# Altium PCB PCB1.PcbDoc
Units mm, origin at the board's own origin, x right, y up, seen from the top; angles counter-clockwise.
Board outline 45 x 45 mm, 2 copper layers (Top Layer, Bottom Layer); 38 components, 26 nets, 179 pads, 50 vias.
Unrouted connection lines stored in the file: 71.
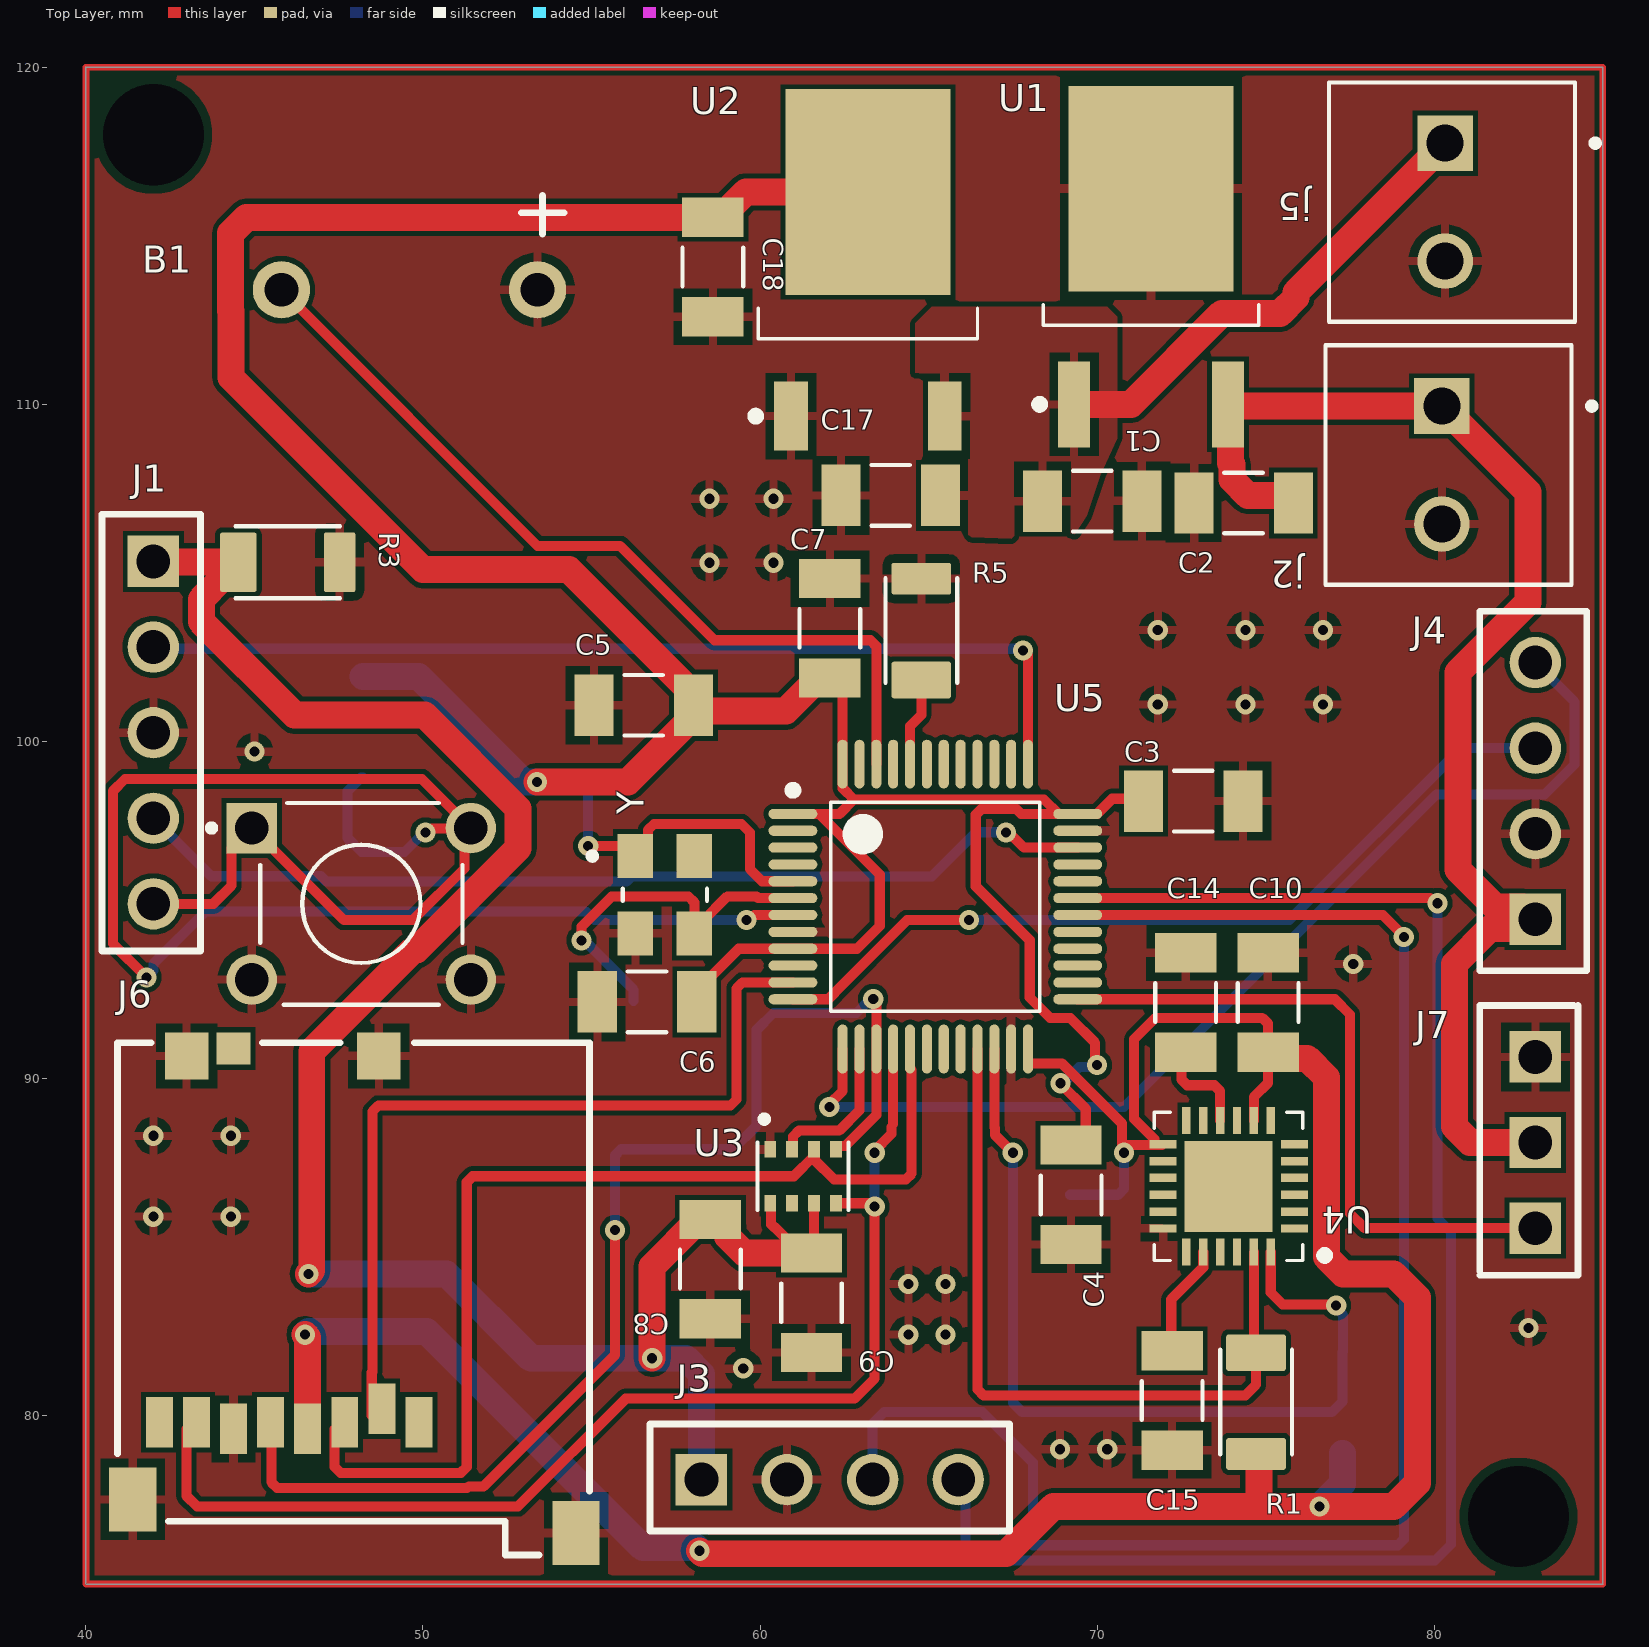
[diagram p0: Top Layer view]
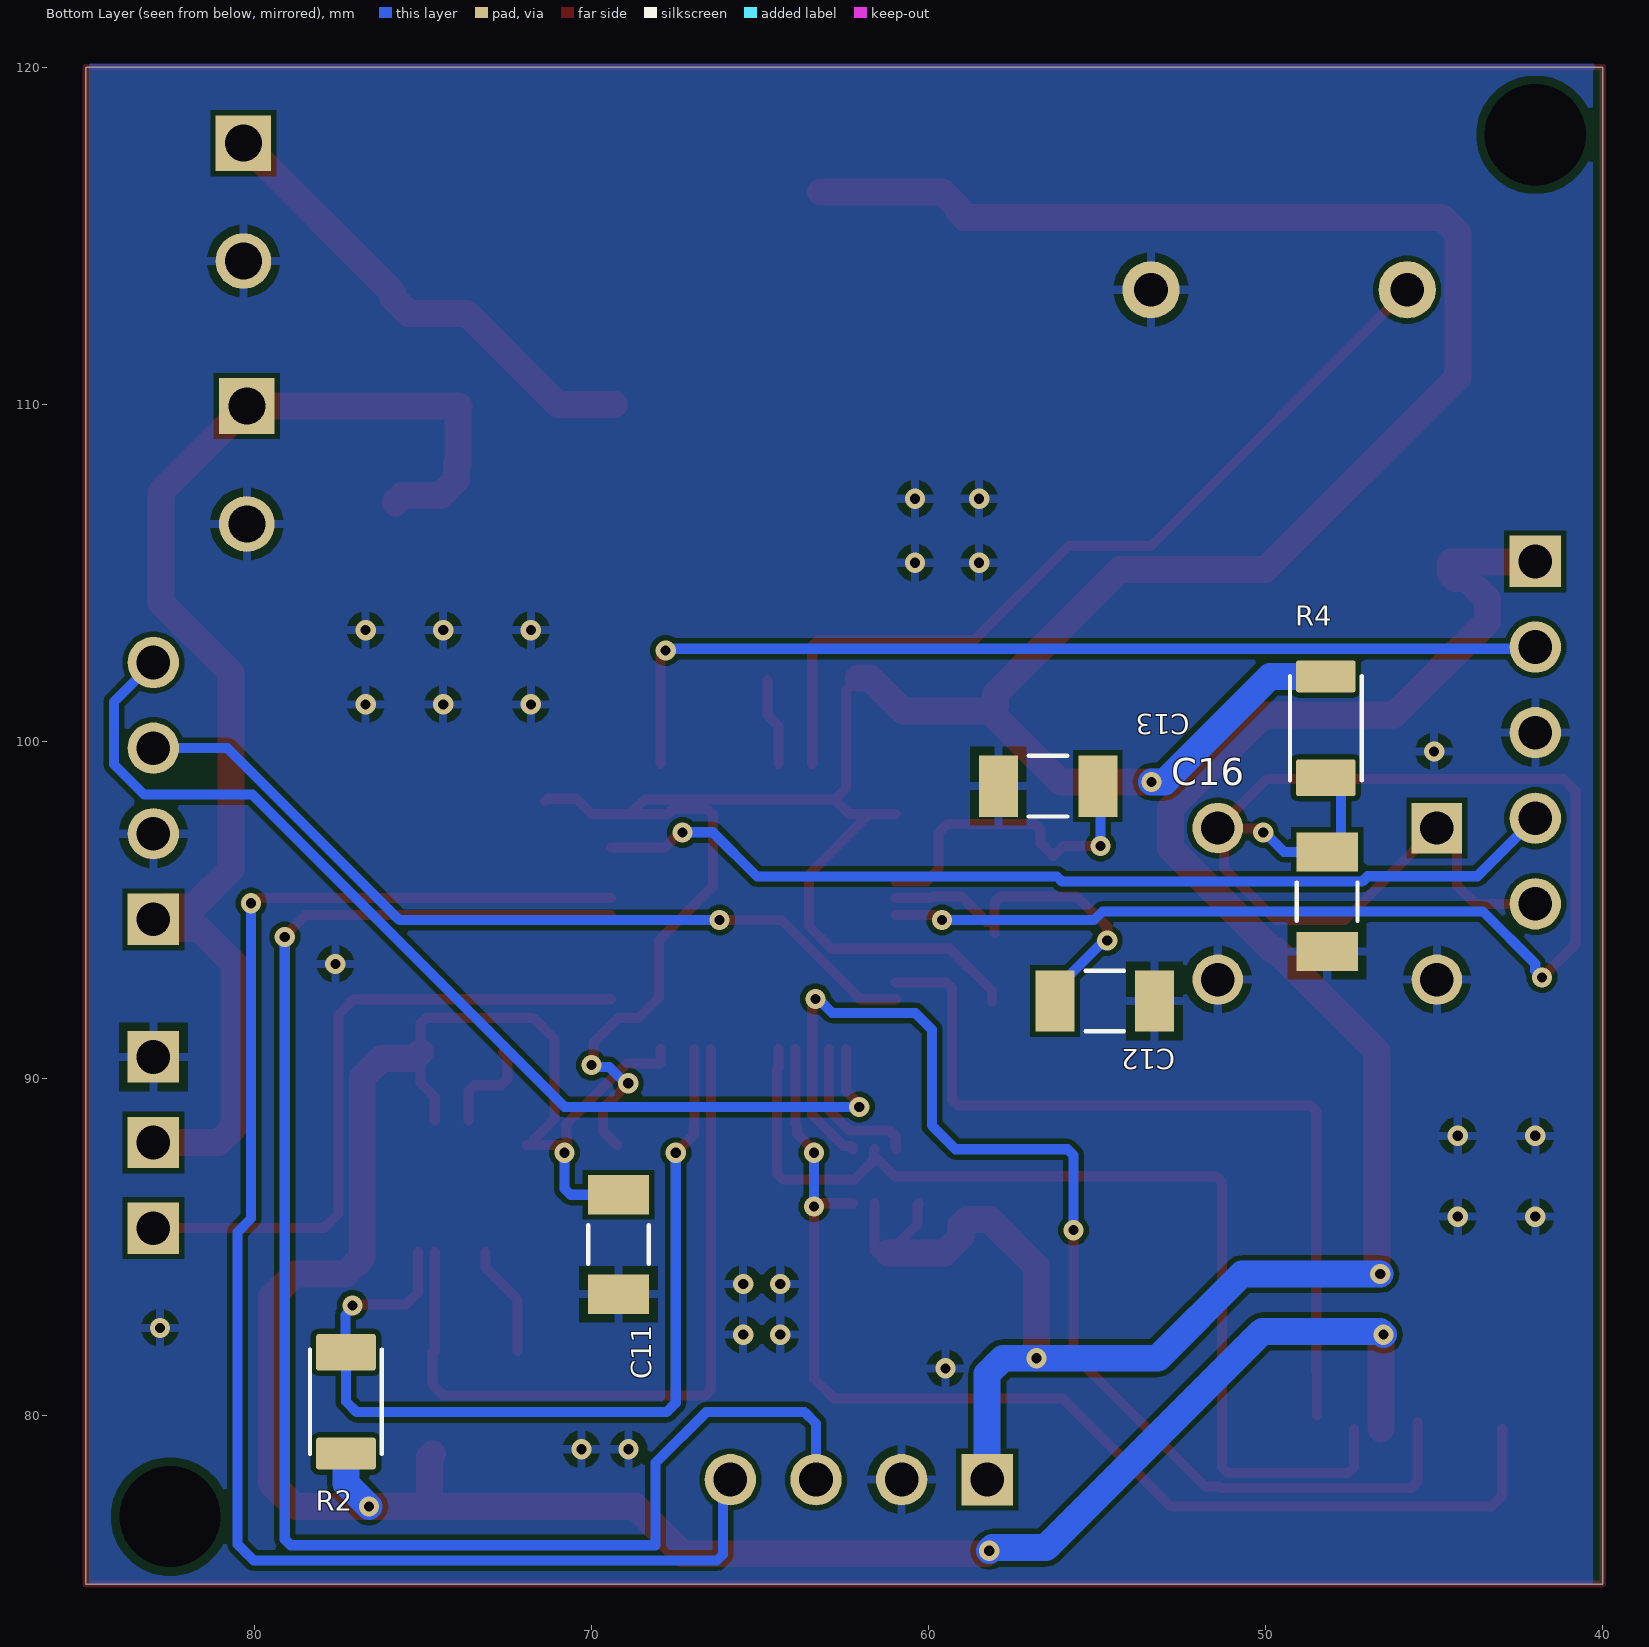
[diagram p1: Bottom Layer view, seen from below]
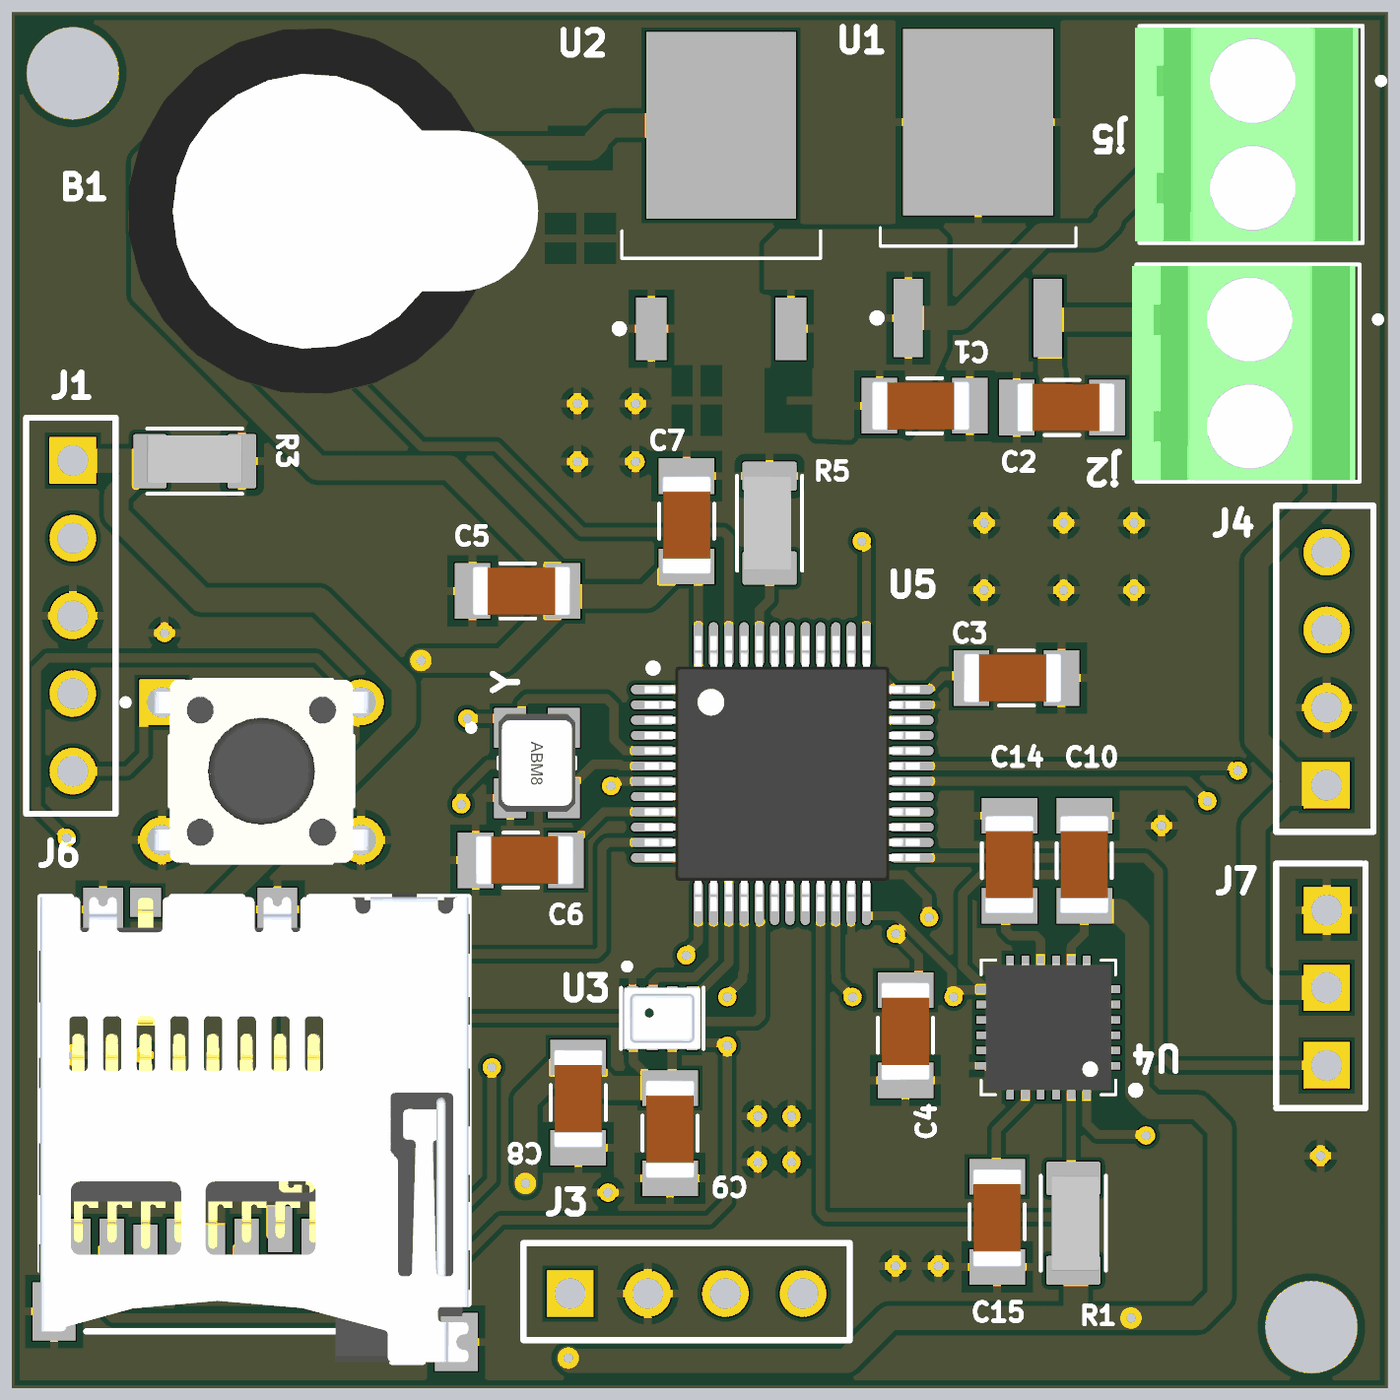
[diagram p2: 3D render of the assembled board from above, using the file's embedded part models]
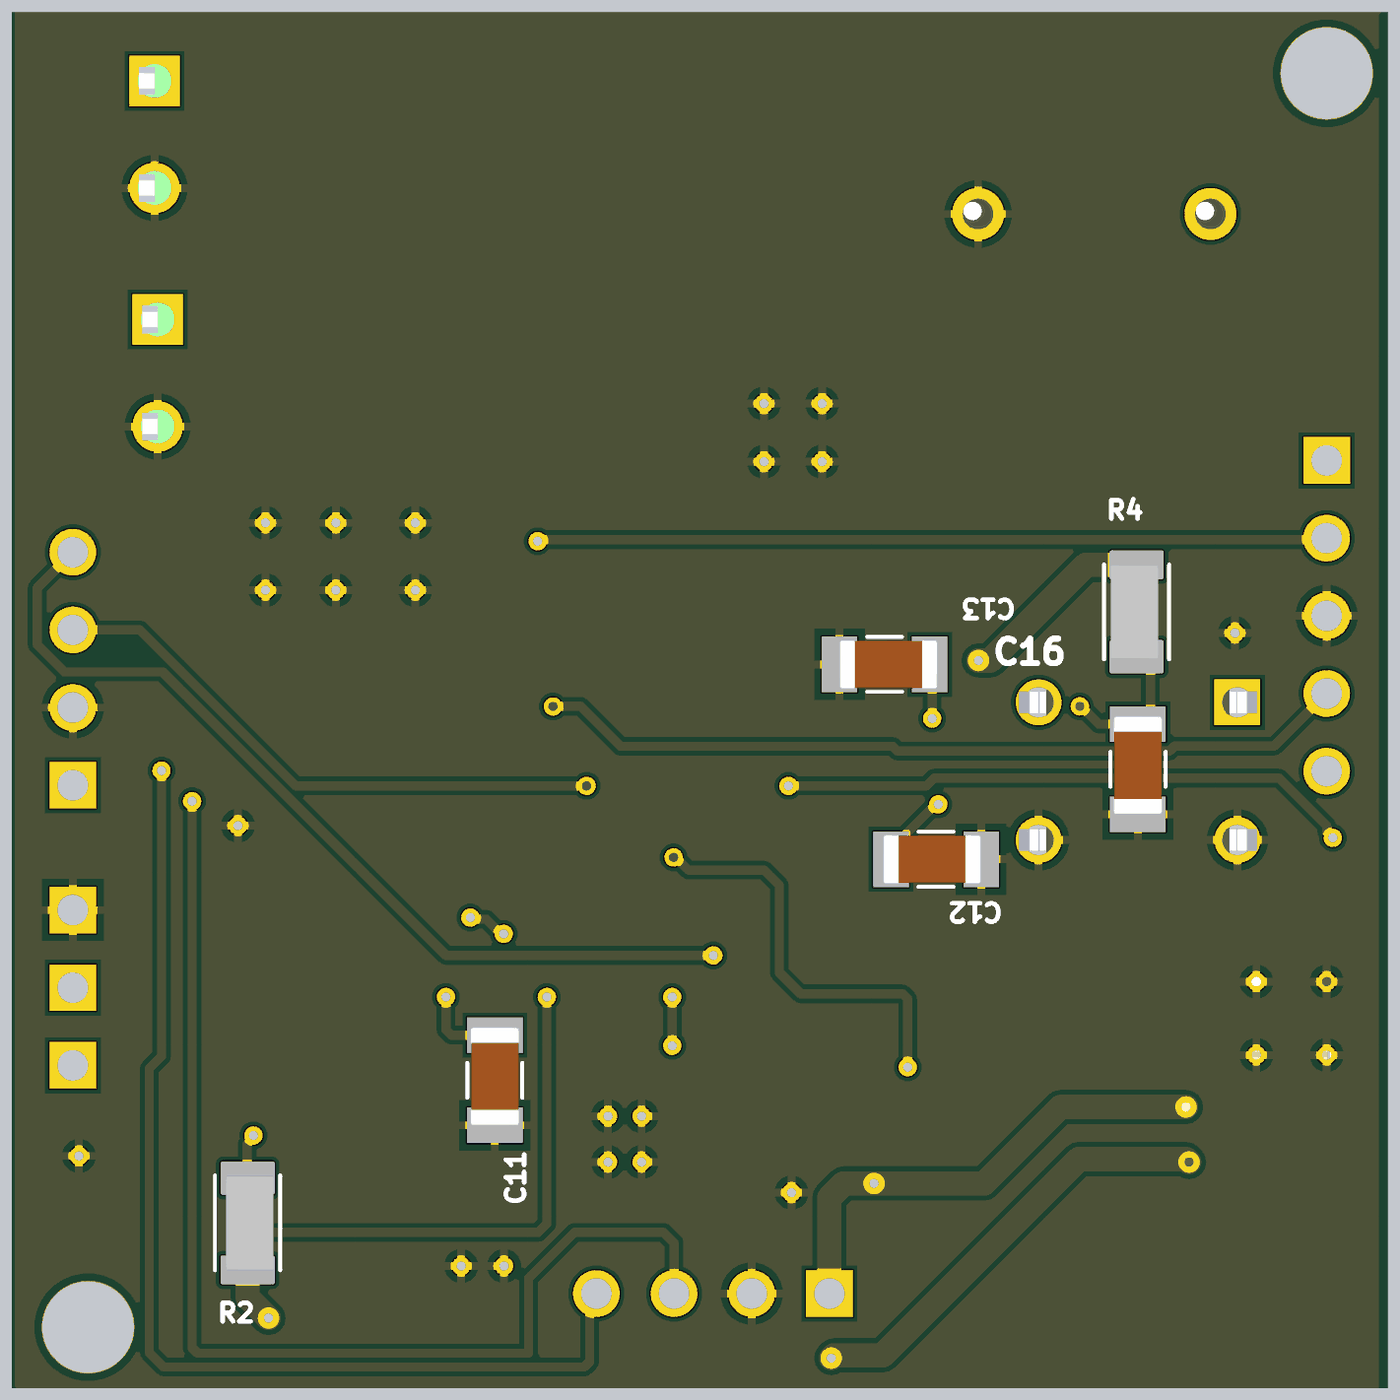
[diagram p3: 3D render of the assembled board from below, using the file's embedded part models]

## Layer stack, top to bottom
Top Solder: solder mask 0.0102, Solder Resist, Dk 3.5
Top Layer: signal copper 0.0356
Dielectric 1: dielectric 0.32, FR-4, Dk 4.8
Bottom Layer: signal copper 0.0356
Bottom Solder: solder mask 0.0102, Solder Resist, Dk 3.5

## Board outline
40,75 85,75 85,120 40,120

## Design rules (kind name [scope] priority, off if disabled: settings)
Clearance [All] p1: gap=0.254 ignorepadtopadclearanceinfootprint=FALSE except(0.152: Arc-Track Arc-SMDPad Arc-Poly Track-Track Track-SMDPad Track-Poly SMDPad-SMDPad SMDPad-THPad SMDPad-Poly THPad-Poly Via-Poly Fill-Poly Poly-Poly)
HoleSize [All] p1: absolutevalues=TRUE maxlimit=3 minlimit=0.01 maxpercent=80.000 minpercent=20.000
HoleToHoleClearance [All] p1: gap=0 allowstackedmicrovias=TRUE
MinimumSolderMaskSliver [All] p1: minsoldermaskwidth=0.1
PolygonConnect [All] p1: connectstyle=Relief reliefconductorwidth=0.254 reliefentries=4 polygonreliefangle="90 Angle" airgapwidth=0.254
RoutingVias [All] p1: holewidth=0.3 width=0.6 viastyle="Through Hole" minholewidth=0.2 minwidth=0.2 maxholewidth=0.9 maxwidth=1.27
SilkToSolderMaskClearance [HasFootprint('No Footprint')] p1: minsilkscreentomaskgap=0.254 clearancetoexposedcopper=TRUE
SolderMaskExpansion [All] p1: expansion=0.05 istentingtop=FALSE
Width [All] p1: maxlimit=1 minlimit=0.1 preferedwidth=0.3 minimp=50.000000 maximp=50.000000 favimp=50.000000
26 further rules are at their usual default settings.

## Classes and differential pairs
component class Schematic1: C1 C2 C3 C4 C5 C6 C7 C8 C9 C10 C11 C12 C13 C14 C15 C16 C17 C18 j2 J3 J4 j5 J6 J7 R1 R2 R3 R4 R5

## Components (designator, comment, footprint, x,y, rotation, side; value= is the part's Value field where it differs from the comment)
B1 "BUZZER" Buzzer 45.8,110.86 r0 top
C1 "330nF" 1206CAPACITOR 69.6,107 r180 top
C2 "0.1uF" 1206CAPACITOR 74.6,107.2 r0 top
C3 "0.1uF" 1206CAPACITOR 72.6,98.1 r180 top
C4 "0.1uF" 1206CAPACITOR 69.1,86.8 r90 top
C5 "0.1uF" 1206CAPACITOR 56.8,101.2 r0 top
C6 "0.1uF" 1206CAPACITOR 56.9,92.4 r0 top
C7 "0.1uF" 1206CAPACITOR 62.2,103.1 r270 top
C8 "0.1uF" 1206CAPACITOR 58.4,84.6 r90 top
C9 "0.1uF" 1206CAPACITOR 61.4,83.6 r90 top
C10 "0.1uF" 1206CAPACITOR 75.2,92 r270 top
C11 "0.1uF" 1206CAPACITOR 69.327,85.329 r90 bottom
C12 "16pF" 1206CAPACITOR 55.029,92.173 r0 bottom
C13 "16pF" 1206CAPACITOR 56.2,98.8 r180 bottom
C14 "0.1uF" 1206CAPACITOR 72.754,92 r270 top
C15 "2.2nF" 1206CAPACITOR 72.1,80.7 r90 top
C16 "0.1uF" 1206CAPACITOR 48.3,95.5 r90 bottom
C17 "10uF" pol_smal_capacitor -390.658,107.046 r180 top
C18 "10uF" pol_smal_capacitor 58.854,-340.458 r270 top
J1 "HEADER 1X5" "HEADER 1X5_2.54mm" 40.349,105.086 r270 top
j2 "klemens 2x1_3.5mm" "KLEMENS 2X1_3.5mm - duplicate" 80.1,108.2 r270 top
J3 "HEADER 1X4" "HEADER 1X4_2.54mm" 58.387,77.592 r0 top
J4 "HEADER 1X4" "HEADER 1X4_2.54mm" 83.508,94.847 r90 top
j5 "klemens 2x1_3.5mm" "KLEMENS 2X1_3.5mm - duplicate" 80.2,116 r270 top
J6 "SD CARD_1" "SD CARD" 48,85.5 r0 top
J7 "HEADER 1X3" "HEADER 1X3_2.54" 88.715,89.243 r90 top
R1 "4.7K" RES 73.9,79.889 r270 top
R2 "4.7K" RES 78.1,79.9 r270 bottom
R3 "10K" RES 46.5,104.5 r0 top
R4 "RES" RES 47.4,100.9 r90 bottom
R5 "10K" RES 65.6,103.8 r90 top
U1 "L7805-SMD" DPAK228P968X230-3N 71.6,114.1 r90 top
U2 "LD108633_DPAK" "LD1086 3.3 REGULATOR" 63.2,114 r90 top
U3 "BMP280" BMP280 62.037,89.513 r90 top
U4 "MPU6050" MPU6050 74.027,88.578 r180 top
U5 "STM32F101" PQFP48-STM 65.2,95.1 r0 top
Y "OSC-8MHz" "OSC KRISTAL" 59.842,95.196 r0 top
? "push_button" push_button 46.9,94.8 r0 top

## Footprints (in the part's own frame and the unit in brackets; to place one, negate y for a bottom-side part, rotate by r counter-clockwise, add the part's x,y. Pads: shape width x height; smd on the part's side, far side on the other; paste and mask are expansions set on the pad)
1206CAPACITOR [mm]
  rect 1.16x1.82 smd: 1(-1.729,-0.127) 2(1.221,-0.127)
  silkscreen extent -0.82,-1.03 0.32,0.77, body extent -1.73,-0.93 1.47,0.67, height 1
BMP280 [mm] "gyro ve ivmeölçer"
  rect 0.5x0.35 smd: 1(-1.613,1.737) 2(-1.613,1.087) 3(-1.613,0.437) 4(-1.613,-0.213) 5(-3.213,-0.213) 6(-3.213,0.437) 7(-3.213,1.087) 8(-3.213,1.737)
  silkscreen extent -3.41,-0.59 -0.62,2.11, body extent -3.41,-0.49 -1.41,2.01, height 1
Buzzer [mm]
  round 1.7 hole 1: 1(0,2.54) 2(7.6,2.54)
  silkscreen extent 7.11,4.19 8.38,5.33, body extent -2.02,-3.36 11.42,8.64, height 10.05
DPAK228P968X230-3N [mm] "D-PAK, 3-Pads, Body 6,40x6,56mm (max), IPC Medium Density"
  rect 2.55x0.95 smd: 1(-4.1,2.28) 2(-4.1,-2.28)
  rect 6.1x4.9 smd: 3(2.3,0)
  silkscreen extent -4.22,-3.2 -1.15,3.43, body extent -1.75,-3.2 4.85,3.2, height 2.3
"HEADER 1X3_2.54" [mil]
  rect 60x60 hole 39.37: 1(-145,225) 2(-45,225) 3(55,225)
  silkscreen extent -200,175 115,290, body extent -195,180 105,280, height 276
"HEADER 1X4_2.54mm" [mil]
  rect 60x60 hole 39.37: 1(-5,20)
  round 60 hole 39.37: 2(95,20) 3(195,20) 4(295,20)
  silkscreen extent -65,-40 355,85, body extent -55,-30 345,70, height 276
"HEADER 1X5_2.54mm" [mil]
  round 60 hole 39.37: 2(90,65) 3(190,65) 4(290,65) 5(390,65)
  rect 60x60 hole 39.37: ""(-10,65) ""(-10,65)
  silkscreen extent -65,5 445,120, body extent -60,10 440,110, height 276
"KLEMENS 2X1_3.5mm - duplicate" [mm]
  rect 1.65x1.65 / inner round 1.65 / far side rect 1.65x1.65 hole 1.1: 1(-1.75,0.127)
  round 1.65 hole 1.1: 2(1.75,0.127)
  silkscreen extent -3.55,-3.32 3.55,4.68, body extent -3.5,-3.47 3.5,3.83, height 8.5
"LD1086 3.3 REGULATOR" [mm] "D-PAK, 3-Pads, Body 6,15x6,61mm (max), IPC Medium Density"
  rect 2.05x1 smd: 1(-4.35,2.28) 2(-4.35,-2.28)
  rect 6.1x4.9 smd: 3(2.3,0)
  silkscreen extent -4.47,-3.25 -1.15,3.45, body extent -2.05,-3.25 4.05,3.25, height 2.3
MPU6050 [mm] "ivme gyro ölçer"
  rect 0.8x0.25 smd mask+0.05: 1(-1.823,3.028) 2(-1.823,2.528) 3(-1.823,2.028) 4(-1.823,1.528) 5(-1.823,1.028) 6(-1.823,0.528) 13(2.077,0.528) 14(2.077,1.028) 15(2.077,1.528) 16(2.077,2.028) 17(2.077,2.528) 18(2.077,3.028)
  rect 0.25x0.8 smd mask+0.05: 7(-1.123,-0.172) 8(-0.623,-0.172) 9(-0.123,-0.172) 10(0.377,-0.172) 11(0.877,-0.172) 12(1.377,-0.172) 19(1.377,3.728) 20(0.877,3.728) 21(0.377,3.728) 22(-0.123,3.728) 23(-0.623,3.728) 24(-1.123,3.728)
  rect 2.6x2.7 smd: 25(0.127,1.778)
  silkscreen extent -2.85,-0.42 2.33,3.98, body extent -1.94,-0.29 2.2,3.85, height 0.9
"OSC KRISTAL" [mm]
  rect 1.05x1.3 smd: 1(-3.542,1.404) 2(-3.542,-0.896) 3(-1.792,-0.896) 4(-1.792,1.404)
  silkscreen extent -4.92,0.07 -1.42,1.5, body extent -3.92,-1.35 -1.42,1.85, height 0.8
pol_smal_capacitor [mm]
  rect 1.16x1.82 smd: 1(-456.008,-0.254) 2(-453.058,-0.254)
  silkscreen extent -455.1,-1.15 -453.96,0.65, body extent -456.01,-1.05 -452.81,0.55, height 1
PQFP48-STM [mm] "TSQFP, 48-Leads, Body 7,00x7,00mm, Pitch 0,50mm, IPC Medium Density"
  oval 1.45x0.3 smd mask+0.05: 1(-4.225,2.75) 2(-4.225,2.25) 3(-4.225,1.75) 4(-4.225,1.25) 5(-4.225,0.75) 6(-4.225,0.25) 7(-4.225,-0.25) 8(-4.225,-0.75) 9(-4.225,-1.25) 10(-4.225,-1.75) 11(-4.225,-2.25) 12(-4.225,-2.75) 25(4.225,-2.75) 26(4.225,-2.25) 27(4.225,-1.75) 28(4.225,-1.25) 29(4.225,-0.75) 30(4.225,-0.25) 31(4.225,0.25) 32(4.225,0.75) 33(4.225,1.25) 34(4.225,1.75) 35(4.225,2.25) 36(4.225,2.75)
  oval 0.3x1.45 smd mask+0.05: 13(-2.75,-4.225) 14(-2.25,-4.225) 15(-1.75,-4.225) 16(-1.25,-4.225) 17(-0.75,-4.225) 18(-0.25,-4.225) 19(0.25,-4.225) 20(0.75,-4.225) 21(1.25,-4.225) 22(1.75,-4.225) 23(2.25,-4.225) 24(2.75,-4.225) 37(2.75,4.225) 38(2.25,4.225) 39(1.75,4.225) 40(1.25,4.225) 41(0.75,4.225) 42(0.25,4.225) 43(-0.25,4.225) 44(-0.75,4.225) 45(-1.25,4.225) 46(-1.75,4.225) 47(-2.25,4.225) 48(-2.75,4.225)
  silkscreen extent -4.35,-3.1 3.1,3.57, body extent -4.5,-4.5 4.5,4.5, height 1.6
push_button [mm]
  rect 1.498x1.498 / inner round 1.498 / far side rect 1.498x1.498 hole 0.99: 1(-1.98,2.631)
  round 1.498 hole 0.99: 2(4.52,2.631) 3(-1.98,-1.869) 4(4.52,-1.869)
  silkscreen extent -3.27,-2.61 4.27,3.38, body extent -2.63,-2.61 5.17,3.38, height 5.01
RES [mm]
  rrect14% 1.09x1.77 smd: 1(-1.977,0.816)
  rrect14% 0.94x1.77 smd: 2(1.028,0.816)
  silkscreen extent -2.06,-0.25 1.04,1.88, body extent -2.06,0.11 1.04,1.66, height 0.53
"SD CARD" [mm]
  rect 0.8x1.5 smd: 1(1.879,-5.697) 2(0.779,-5.297) 3(-0.321,-5.697) 4(-1.421,-5.897) 5(-2.521,-5.697) 6(-3.621,-5.897) 7(-4.721,-5.697) 8(-5.821,-5.697)
  rect 1x0.95 smd: 9(-3.621,5.388)
  rect 1.3x1.4 smd: 10(-5.011,5.163) 11(0.689,5.163)
  rect 1.4x1.9 smd: 12(6.539,-8.987) 13(-6.611,-7.987)
  silkscreen extent -7.06,-9.64 6.94,5.56, body extent -7.11,-9.64 6.99,5.66, height 1.95

## Part data
C1 C2 C3 C4 C5 C6 C7 C8 C9 C10 C11 C12 C13 C14 C15 C16: library part 1206CAPACITOR
C17 C18: library part "pol small capacitor"
R1 R2 R3 R5: library part RES
U1: "L7805-SMD REGULATOR"
U2: library part "LD1086-3.3 Regulator"
U5: DATASHEET=https://datasheetspdf.com/pdf-file/598718/STMicroelectronics/STM32F101xB/1

## Free pads (board coordinates)
  round 1.524 hole 3: 23(82.5,77) 24(42,118)

## Via types
v1: diameter 0.6, hole 0.3, Top Layer to Bottom Layer, 50 vias

## Nets (pads, with @x,y where several pads share a name; then routed paths per layer and width w, separated by ;. In a path a pad name is that pad's centre, name@x,y a point inside that pad or via, vN(x,y) a via of type N, cw(c..) or ccw(c..) an arc to the next point about the centre after c; other vN are vias at no path point)
3.3V: C3.2 C4.2 C5.2 C6.2 C7.2 C10.2 C11.2 C18.1 J6.4 R1.2 R2.2 R4.2 U2.3 U4.8 U4.13 U5.1 U5.9 U5.24 U5.36 U5.48 | length 177.5
  Top Layer w0.3: C6.2 58.121,92.603 59.368,93.85 62.876,93.85 63.55,94.524 63.55,96.05 61.75,97.85 ; U5.1 61.75,97.85 ; C7.2 62.45,101.502 U5.48 62.45,98.611 62.787,98.274 ; U5.24 67.95,90.45 68.95,90.45 70.743,88.657 70.743,88.057 v1@70.8,88 ; v1(68.91,89.86) 68.91,89.852 69.662,89.1 69.662,88.451 69.232,88.021 C4.2 ; v1(70,90.396) 69.943,90.453 69.943,91.057 69.207,91.793 68.607,91.793 68,92.4 68,94.1 66.4,95.7 66.4,97.824 66.576,98 67.592,98 67.742,97.85 U5.36@68.85,97.85 ; v1(70.8,87.796) v1@70.8,88 ; C3.2 71.306,98.3 70.45,98.3 70,97.85 U5.36 U5.36@68.85,97.85 ; U4.13@71.925,88.025 U4.13@71.75,88.025 ; U4.8 74.65,89.45 75.073,89.873 C10.2 75.073,91.624 74.897,91.8 71.731,91.8 71.1,91.169 71.1,88.8 71.7,88.2 71.7,88.075 U4.13@71.75,88.025 ; 61.75,97.85 62.362,97.85 62.787,98.274 ; 62.787,98.274 68.426,98.274 U5.36@68.85,97.85 ; v1@70.8,88 70.825,88.025 U4.13@71.75,88.025
  Top Layer w0.8: v1(46.5,82.4) 46.579,82.321 J6.4 ; v1(53.384,98.8) 56.078,98.8 C5.2@58.021,100.743 ; C5.2 58.021,101.403 54.326,105.098 50.002,105.098 44.3,110.8 44.3,112.773 44.296,112.777 44.296,115.077 44.769,115.55 C18.1 58.93,115.55 59.11,115.73 59.11,115.831 59.579,116.3 U2.3 ; C5.2@58.194,100.9 60.764,100.9 61.743,101.879 C7.2 ; v1(58.2,75.989) 58.289,75.9 67.3,75.9 68.7,77.3 75,77.3 ; R1.2 74.8,78.777 74.8,77.5 75,77.3 ; C10.2 75.253,90.599 76.231,90.599 76.802,90.028 76.802,84.698 77.3,84.2 78.8,84.2 79.5,83.5 79.5,78 78.8,77.3 v1(76.6,77.3) 75,77.3
  Bottom Layer w0.3: v1(68.91,89.86) 68.991,89.86 69.47,90.339 69.943,90.339 v1(70,90.396) ; C11.2 70.624,86.55 70.8,86.726 v1(70.8,87.796)
  Bottom Layer w0.8: v1(46.5,82.4) 46.6,82.5 50.1,82.5 56.521,76.079 58.11,76.079 v1(58.2,75.989) ; R4.2 49.872,101.928 53,98.8 v1(53.384,98.8) ; v1(76.6,77.3) 77.284,77.984 R2.2
3V3: C8.2 C9.2 J1. J3.1 R3.1 U3.6 U3.8 | length 61.1
  Top Layer w0.3: U3.8 60.325,86.275 60.325,85.675 60.4,85.6 60.418,85.6 61.197,84.821 C9.2 61.6,84.894 U3.6
  Top Layer w0.8: J1.@42,105.34 42.012,105.328 44.511,105.328 R3.1 44.523,104.976 44.378,104.831 44.038,104.831 43.423,104.216 43.423,103.553 46.194,100.783 50.052,100.783 52.823,98.012 52.823,96.83 49.81,93.818 49.713,93.818 46.7,90.805 46.7,84.3 v1(46.6,84.2) ; v1(56.8,81.7) 56.8,84.424 58.197,85.821 C8.2 58.857,85.821 59.037,85.641 59.037,85.311 59.527,84.821 C9.2@61.197,84.821
  Bottom Layer w0.8: v1(46.6,84.2) 50.7,84.2 53.2,81.7 v1(56.8,81.7) 57.795,81.7 58.264,81.231 J3.1@58.264,78.104
5V: C2.2 j2.1 J4.1 J7.2 U1.2 | length 39.6
  Top Layer w0.8: C2.2 75.821,107.12 75.641,107.3 74.472,107.3 74.003,107.769 74.003,108.212 73.955,108.26 73.955,109.925 73.93,109.95 j2.1 82.777,107.4 82.777,104.12 80.7,102.043 80.7,96.2 81.818,95.082 82.638,95.082 J4.1 82.729,94.449 81.649,94.449 80.6,93.4 80.6,88.569 81.069,88.1 J7.2
7.4V: C1.2 C17.1 j5.1 U1.1 U2.2 | length 14.3
  Top Layer w0.8: U1.1 71,110 73.7,112.7 75.431,112.7 75.9,113.169 75.9,113.323 j5.1
GND: ?.3 ?.4 B1.2 C1.1 C2.1 C3.1 C4.1 C5.1 C6.1 C7.1 C8.1 C9.1 C10.1 C11.1 C12.1 C13.1 C14.1 C15.1 C16.1 C17.2 C18.2 J1.3 j2.2 J3.2 J4.2 j5.2 J6.6 J6.10 J6.11 J6.12 J6.13 J7.3 R3.2 R5.2 U1.3 U2.1 U3.1 U3.7 U4.1 U4.9 U4.11 U4.18 U5.8 U5.23 U5.35 U5.47 Y.2 Y.4
  other v1: 68.9,79 70.3,79 59.5,81.4 64.4,82.4 65.5,82.4 82.8,82.6 64.4,83.9 65.5,83.9 42,85.9 44.3,85.9 42,88.3 44.3,88.3 77.6,93.4 45,99.7 71.8,101.1 74.4,101.1 76.7,101.1 71.8,103.3 74.4,103.3 76.7,103.3 58.5,105.3 60.4,105.3 58.5,107.2 60.4,107.2
Net_1: ?.1 ?.2 C16.2 J1.5 R4.1 U5.7 | length 57.5
  Top Layer w0.3: v1(41.8,93) 40.8,94 40.8,98.524 41.162,98.886 49.965,98.886 ?.2 51.232,97.243 51.232,96.232 49.7,94.7 47.651,94.7 ?.1 44.321,96.832 44.321,95.721 43.78,95.18 J1.5 ; v1(50.072,97.3) 50.153,97.3 50.266,97.413 ?.2@51.402,97.413 ; v1(59.6,94.7) 59.681,94.7 59.831,94.85 U5.7
  Bottom Layer w0.3: v1(41.8,93) 42,93.2 42,93.4 43.554,94.954 54.837,94.954 55.092,94.7 v1(59.6,94.7) ; R4.1 48.159,98.923 47.764,98.528 47.764,97.13 C16.2 49.451,96.721 50.03,97.3 v1(50.072,97.3)
NetB1_1: B1.1 U5.46 | length 25.5
  Top Layer w0.3: B1.1 53.4,105.8 55.85,105.8 58.65,103 63.274,103 63.45,102.824 U5.46
NetC12_2: C12.2 U5.6 Y.3 | length 10.9
  Top Layer w0.3: v1(54.7,94.096) 54.7,94.5 55.6,95.4 57.874,95.4 58.05,95.224 Y.3@58.05,94.65 ; Y.3 Y.3@58.05,94.65 ; U5.6 59.946,95.35 59.892,95.404 59.029,95.404 58.275,94.65 Y.3@58.05,94.65
  Bottom Layer w0.3: v1(54.7,94.096) 54.757,94.039 54.841,94.039 56.25,92.63 C12.2
NetC13_2: C13.2 U5.5 Y.1 | length 10
  Top Layer w0.3: v1(54.9,96.9) 56,96.9 Y.1 56.675,96.975 56.675,97.376 56.851,97.552 59.448,97.552 59.7,97.3 59.7,96.211 60.061,95.85 U5.5
  Bottom Layer w0.3: v1(54.9,96.9) 54.9,98.594 C13.2
NetC14_2: C14.2 U4.10 | length 3
  Top Layer w0.3: C14.2 72.5,90.652 72.5,89.976 72.676,89.8 73.474,89.8 73.65,89.624 U4.10
NetC15_2: C15.2 U4.20 | length 3.3
  Top Layer w0.3: C15.2@72.2,81.921 72.2,83.448 73.15,84.398 U4.20
NetJ1_2: J1.2 U5.37 | length 29.3
  Top Layer w0.3: v1(67.8,102.7) 67.95,102.55 U5.37
  Bottom Layer w0.3: J1.2 42.05,102.75 67.75,102.75 v1(67.8,102.7)
NetJ1_4: J1.4 U5.34 | length 29
  Top Layer w0.3: v1(67.3,97.296) 67.381,97.296 67.827,96.85 U5.34
  Bottom Layer w0.3: J1.4 43.72,96 46.977,96 47.138,95.839 56.038,95.839 56.193,95.993 65.093,95.993 66.404,97.304 67.292,97.304 v1(67.3,97.296)
NetJ3_3: J3.3 U5.30 | length 48.5
  Top Layer w0.3: U5.30 78.477,94.85 79.1,94.227 v1(79.1,94.2)
  Bottom Layer w0.3: J3.3 63.34,79.764 63.676,80.1 66.6,80.1 68.1,78.6 68.1,76.152 78.924,76.152 79.1,76.328 v1(79.1,94.2)
NetJ3_4: J3.4 U5.31 | length 46.9
  Top Layer w0.3: U5.31 79.869,95.35 80.019,95.2 v1(80.1,95.2)
  Bottom Layer w0.3: J3.4 66.1,77.88 66.1,75.876 66.276,75.7 80.024,75.7 80.5,76.176 80.5,85.447 80.1,85.847 v1(80.1,95.2)
NetJ4_3: J4.3 U5.12 | length 25.1
  Top Layer w0.3: U5.12 62.025,92.35 62.201,92.526 62.201,92.536 64.365,94.7 v1(66.2,94.7)
  Bottom Layer w0.3: v1(66.2,94.7) 75.7,94.7 80.8,99.8 J4.3
NetJ4_4: J4.4 U5.13 | length 31.7
  Top Layer w0.3: v1(62.056,89.156) 62.056,89.237 62.45,89.631 U5.13
  Bottom Layer w0.3: v1(62.056,89.156) 70.795,89.156 80.065,98.426 83.275,98.426 84.166,99.317 84.166,101.174 J4.4
NetJ6_2: J6.2 U5.11 | length 25
  Top Layer w0.3: J6.2@48.479,80.003 48.479,81.279 48.5,81.3 48.5,89.024 48.676,89.2 59.124,89.2 59.3,89.376 59.3,92.674 59.476,92.85 U5.11
NetJ6_3: J6.3 U3.3 U5.17 | length 31.5
  Top Layer w0.3: J6.3@47.379,79.603 47.379,78.476 47.555,78.3 51.124,78.3 51.3,78.476 51.3,86.924 51.476,87.1 61.002,87.1 U3.3@61.6,87.698 ; U3.3 61.625,87.875 61.625,87.575 62.2,87 64.322,87 64.498,87.176 64.498,90.252 64.45,90.3 U5.17
NetJ6_5: J6.5 U3.4 U5.15 | length 36
  Top Layer w0.3: J6.5 45.5,79.782 45.5,78.024 45.676,77.848 51.311,77.848 51.363,77.9 51.8,77.9 55.7,81.8 v1(55.7,85.5) ; U3.4 62.25,87.975 62.275,88 62.535,88 63.45,88.915 U5.15 63.45,92.188 63.357,92.28 v1(63.357,92.362)
  Bottom Layer w0.3: v1(55.7,85.5) 55.7,87.724 55.876,87.9 59.2,87.9 59.9,88.6 59.9,91.449 60.397,91.946 62.86,91.946 63.276,92.362 v1(63.357,92.362)
NetJ6_7: J6.7 U3.5 U5.16 | length 35.2
  Top Layer w0.3: J6.7@42.979,79.603 42.979,77.621 43.3,77.3 52.811,77.3 56.011,80.5 62.8,80.5 63.4,81.1 v1(63.4,86.2) 63.319,86.2 63.221,86.298 62.275,86.298 62.273,86.3 U3.5 ; v1(63.4,87.796) 63.4,87.857 63.9,88.357 63.9,88.561 ; 63.95,88.645 U5.16
  Bottom Layer w0.3: v1(63.4,86.2) v1(63.4,87.796)
NetJ7_1: J7.1 U5.25 | length 19.8
  Top Layer w0.3: U5.25 77.05,92.35 77.504,91.896 77.504,85.996 77.94,85.56 J7.1
NetR1_1: R1.1 U4.23 U5.21 | length 22.5
  Top Layer w0.3: U5.21 66.45,80.776 66.626,80.6 74.4,80.6 74.716,80.916 R1.1 74.65,81.932 U4.23
NetR2_1: R2.1 U4.24 U5.22 | length 27
  Top Layer w0.3: U5.22 66.95,88.55 66.966,88.534 66.966,88.33 v1(67.5,87.796) ; U4.24 75.15,83.65 75.5,83.3 77.062,83.3 v1(77.093,83.269)
  Bottom Layer w0.3: v1(67.5,87.796) 67.5,80.376 67.776,80.1 76.969,80.1 77.284,80.416 R2.1 77.3,81.893 77.3,82.981 77.093,83.188 v1(77.093,83.269)
NetR5_1: R5.1 U5.44 | length 2.6
  Top Layer w0.3: U5.44 64.45,100.45 64.784,100.784 R5.1
NetU3_2: U3.2 U5.14 | length 4.5
  Top Layer w0.3: U3.2 60.975,87.925 60.975,88.276 61.151,88.452 62.348,88.452 62.95,89.054 U5.14
pads on no net: J6.1 J6.8 J6.9 U4.2 U4.3 U4.4 U4.5 U4.6 U4.7 U4.12 U4.14 U4.15 U4.16 U4.17 U4.19 U4.21 U4.22 U4.25 U5.2 U5.3 U5.4 U5.10 U5.18 U5.19 U5.20 U5.26 U5.27 U5.28 U5.29 U5.32 U5.33 U5.38 U5.39 U5.40 U5.41 U5.42 U5.43 U5.45
copper on no net: | length 180
  Top Layer w0.2: 40,75 40,120 85,120 85,75 40,75

## Polygon pours and split planes (outlines as drawn)
GND on Top Layer "GND_L01_P003" (solid, pour order 3): 40,120 85,120 85,74.8 84.8,75 40,75
7.4V on Top Layer "7.4V_L01_P000" (solid, pour order 0): 70.3,112.9 70.6,112.6 70.6,109 70.1,107.9 69.7,106.7 69.21,105.941 65.1,106.1 64.6,106.6 64.6,112.4 65.1,112.9
GND on Bottom Layer "GND_L02_P004" (solid, pour order 4): 84.9,120.1 84.9,75.1 85,75 40.3,75 40.3,119.9 40.1,120.1